# Altium PCB MCH_CLKB_PCB.PcbDoc (part 3 of 5)
Units mil, origin at the board's own origin, x right, y up, seen from the top; angles counter-clockwise.
Board outline 7110.67 x 2894.12 mil, 6 copper layers (Top Layer, GND, MidLayer1, MidLayer2, InternalPlane1, Bottom Layer), stack 61.549 mil thick; 421 components, 433 nets, 2112 pads, 1311 vias.
Unrouted connection lines stored in the file: 39.
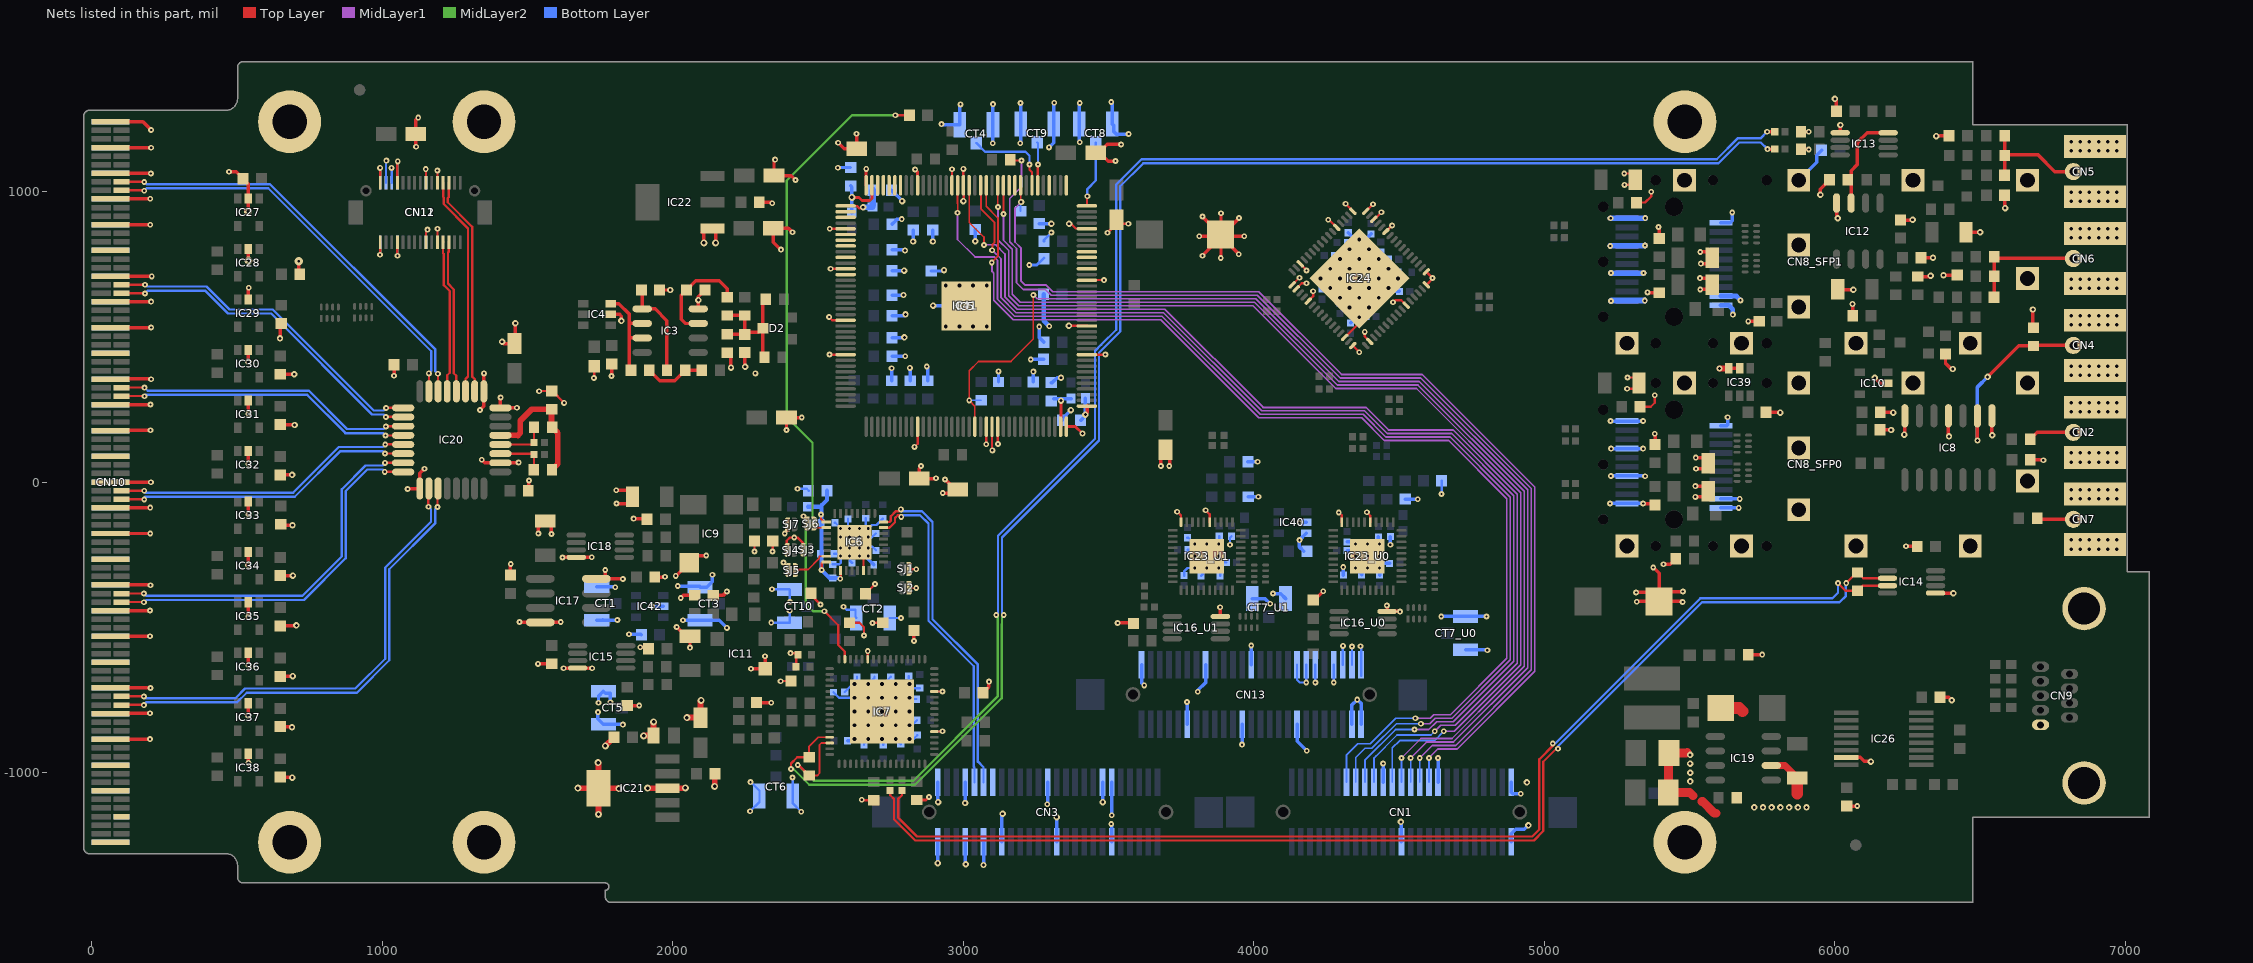
[diagram p7: the nets of this part, all layers, seen from the top]

## Via types
v1: diameter 20, hole 8, Top Layer to Bottom Layer, tented both sides, 842 vias
v2: diameter 22, hole 10, Top Layer to Bottom Layer, tented both sides, 199 vias
v3: diameter 24, hole 12, Top Layer to Bottom Layer, tented both sides, 163 vias
v4: diameter 25.98, hole 12.99, Top Layer to Bottom Layer, tented both sides, 58 vias
v5: diameter 20, hole 10, Top Layer to Bottom Layer, tented both sides, 18 vias
v6: diameter 20, hole 10, Top Layer to Bottom Layer, 16 vias
v7: diameter 28, hole 10, Top Layer to Bottom Layer, tented both sides, 15 vias

## Nets (pads, with @x,y where several pads share a name; then routed paths per layer and width w, separated by ;. In a path a pad name is that pad's centre, name@x,y a point inside that pad or via, vN(x,y) a via of type N, cw(c..) or ccw(c..) an arc to the next point about the centre after c; other vN are vias at no path point) (continued)
DMTDCLK_MAIN_N: CN3.11 IC6.32 | length 1178.4
  Top Layer w8: IC6.32@2725.78,-137.28 2746.5,-137.28 2751.04,-132.74 2751.04,-117.46 2768.5,-100 2779.5,-100 v1(2785.5,-94)
  Bottom Layer w8: v1@2787.5,-100 2857.3,-100 2894.5,-137.2 2894.5,-236 2894.5,-472 3050.5,-628 3050.5,-962.36 3070.14,-982 CN3.11@3070.14,-1033.86
DMTDCLK_MAIN_P: CN3.9 IC6.31 | length 1176.7
  Top Layer w8: IC6.31@2725.78,-156.96 2746.5,-156.96 2752.19,-151.28 2752.3,-151.28 2765.04,-138.54 2765.04,-123.46 2774.5,-114 2786.5,-114 v1(2786.5,-120)
  Bottom Layer w8: v1@2791.5,-114 2851.5,-114 2880.5,-143 2880.5,-262 ; 2880.5,-236 2880.5,-262 ; CN3.9@3038.64,-1033.86 3038.64,-982 3036.5,-979.86 3036.5,-633.8 2880.5,-477.8 2880.5,-262
DMTDCLK_SLOT1_N: CN10.18 IC20.26 | length 1621.5
  Top Layer w8: CN10.18@101.42,-737.54 179.04,-737.54 v1(179.5,-738) ; IC20.26@1158.74,-24.32 1158.74,-84.24 v1(1159.5,-85)
  Bottom Layer w8: v1@179.04,-737.54 185.5,-744 494.7,-744 527.7,-711 907.5,-711 1010.5,-608 1010.5,-294.5 1168,-137 1168,-93.5 v1(1159.5,-85)
DMTDCLK_SLOT1_P: CN10.17 IC20.27 | length 1646.2
  Top Layer w8: CN10.17@101.42,-767.06 178.56,-767.06 v1(179.5,-768) ; IC20.27@1190.24,-24.32 1190.24,-85.74 v1(1190.5,-86)
  Bottom Layer w8: v1@178.56,-767.06 187.63,-758 500.5,-758 533.5,-725 913.3,-725 1024.5,-613.8 1024.5,-300.3 1182,-142.8 1182,-94.5 v1(1190.5,-86)
DMTDCLK_SLOT2_N: CN10.30 IC20.23 | length 1297.5
  Top Layer w8: CN10.30@101.42,-383.54 179.04,-383.54 v1(179.5,-384) ; v1(1009.5,66) 1010.26,66.76 IC20.23@1070.18,66.76
  Bottom Layer w8: v1(179.5,-384) 187.5,-392 724.5,-392 860.5,-256 860.5,-25.2 942.7,57 1000.5,57 v1(1009.5,66)
DMTDCLK_SLOT2_P: CN10.29 IC20.24 | length 1297.1
  Top Layer w8: CN10.29@101.42,-413.06 178.56,-413.06 v1(179.5,-414) ; v1(1008.5,35) 1008.76,35.26 IC20.24@1070.18,35.26
  Bottom Layer w8: v1(179.5,-414) 187.5,-406 730.3,-406 874.5,-261.8 874.5,-31 948.5,43 1000.5,43 v1(1008.5,35)
DMTDCLK_SLOT3_N: CN10.42 IC20.21 | length 1035
  Top Layer w8: CN10.42@102.42,-29.53 180.04,-29.54 v1(180.5,-30) ; v1(1010.5,129) 1011.26,129.76 IC20.21@1071.18,129.76
  Bottom Layer w8: v1@183.5,-37 537.7,-37 693.2,-37 850.7,120.5 1002,120.5 v1(1010.5,129)
DMTDCLK_SLOT3_P: CN10.41 IC20.22 | length 1035
  Top Layer w8: CN10.41@102.42,-59.06 179.56,-59.06 v1(180.5,-60) ; v1(1009.5,98) 1009.76,98.26 IC20.22@1071.18,98.26
  Bottom Layer w8: v1@183.5,-51 699,-51 856.5,106.5 1001,106.5 v1(1009.5,98)
DMTDCLK_SLOT4_N: CN10.54 IC20.19 | length 1032.8
  Top Layer w8: CN10.54@103.42,325.46 181.04,325.46 v1(181.5,325) ; v1(1012.5,191) 1013.26,191.76 IC20.19@1073.18,191.76
  Bottom Layer w8: v1(181.5,325) 192.5,314 747.5,314 879,182.5 1004,182.5 v1(1012.5,191)
DMTDCLK_SLOT4_P: CN10.53 IC20.20 | length 1030.3
  Top Layer w8: CN10.53@103.42,295.94 180.56,295.94 v1(181.5,295) ; v1(1011.5,160) 1011.76,160.26 IC20.20@1073.18,160.26
  Bottom Layer w8: v1(181.5,295) 186.5,300 741.7,300 873.2,168.5 1003,168.5 v1(1011.5,160)
DMTDCLK_SLOT5_N: CN10.66 IC20.17 | length 1151.9
  Top Layer w8: CN10.66@105.42,679.46 183.04,679.46 v1(183.5,679) ; v1(1013.5,255) 1014.26,255.76 IC20.17@1074.18,255.76
  Bottom Layer w8: v1(183.5,679) 189.5,673 395.5,673 474.5,594 623.5,594 971,246.5 1005,246.5 v1(1013.5,255)
DMTDCLK_SLOT5_P: CN10.65 IC20.18 | length 1153.6
  Top Layer w8: CN10.65@105.42,649.94 182.56,649.94 v1(183.5,649) ; v1(1012.5,224) 1012.76,224.26 IC20.18@1074.18,224.26
  Bottom Layer w8: v1(183.5,649) 193.5,659 389.7,659 468.7,580 617.7,580 965.2,232.5 1004,232.5 v1(1012.5,224)
DMTDCLK_SLOT6_N: CN10.78 IC20.14 | length 1466.5
  Top Layer w8: CN10.78@102.42,1033.46 v1@180.04,1033.46 ; v1(1191.5,373) 1192.26,372.24 IC20.14@1192.26,312.32
  Bottom Layer w8: v1(180.5,1033) 188.5,1025 613.8,1025 1183,455.8 1183,381.5 v1(1191.5,373)
DMTDCLK_SLOT6_P: CN10.77 IC20.15 | length 1444
  Top Layer w8: CN10.77@102.42,1003.94 179.56,1003.94 v1(180.5,1003) ; v1(1160.5,374) 1160.76,373.74 IC20.15@1160.76,312.32
  Bottom Layer w8: v1(180.5,1003) 188.5,1011 608,1011 1169,450 1169,382.5 v1(1160.5,374)
DMTDCLK_SLOT7_N: CN12.5 IC20.10 | length 792.7
  Top Layer w8: CN12.5@1229.43,1030.36 1229.43,981.43 1225.6,977.6 1225.6,962.9 1309.49,879.01 1309.49,643.3 ; 1309.49,677.99 1309.49,643.3 ; IC20.10@1318.24,312.32 1318.24,355 1309.49,363.75 1309.49,643.3
DMTDCLK_SLOT7_P: CN12.7 IC20.11 | length 767
  Top Layer w8: CN12.7@1209.74,1030.36 1209.74,981.16 1211.5,979.4 1211.5,957.2 1295.49,873.21 1295.49,674 ; IC20.11@1286.74,312.32 1286.74,355 1295.49,363.75 1295.49,674 ; 1295.49,683.79 1295.49,674
DMTDCLK_SLOT8_N: CN12.6 IC20.12 | length 527.1
  Top Layer w8: CN12.6@1229.5,825.56 CN12.6@1229.43,825.64 1229.43,793.03 1226.3,789.9 1226.3,776.1 1226.3,683.3 1246.5,663.1 1246.5,374.5 1255.25,365.75 ; IC20.12@1255.25,312.32 1255.25,365.75 ; 1255.5,366 1255.25,365.75
DMTDCLK_SLOT8_P: CN12.8 IC20.13 | length 532.7
  Top Layer w8: CN12.8@1209.74,825.64 1209.5,825.4 1209.5,787.5 1212.3,784.7 1212.3,756.9 ; 1212.3,762.7 1212.3,756.9 ; 1223.5,368 1223.75,367.75 ; IC20.13@1223.75,312.32 1223.75,367.75 ; 1212.3,756.9 1212.3,677.5 1232.5,657.3 1232.5,376.5 1223.75,367.75
EXT125_N: C105.2 IC7.14 R49.1 | length 5335.8
  Top Layer w6: R49.1@2469.5,-1010.5 2497,-1010.5 2505.5,-1002 2505.5,-905 2512.5,-898 2540.11,-898 IC7.14@2540.38,-898.27
  Top Layer w8: v1(2430.5,-974) 2433,-974 R49.1@2469.5,-1010.5
  Top Layer w12: v1(5767.5,1206) C105.2@5793.78,1206
  MidLayer2 w8: v1@2431.5,-974 2485.5,-1028 2828.5,-1028 3118.5,-738 3118.5,-537 3118.5,-463 v1(3113.5,-458)
  Bottom Layer w8: v1(3113.5,-458) 3119.5,-452 3119.5,-185 3453.5,149 3453.5,451.08 3475.42,473 3475.5,473 3526.5,524 3526.5,1023.8 3613.7,1111 5593.7,1111 5665.7,1183 5744.5,1183 v1(5767.5,1206)
EXT125_P: C104.2 IC7.13 R49.2 | length 5338.3
  Top Layer w6: R49.2@2469.5,-947.5 2469.5,-910 2500.92,-878.58 IC7.13@2540.38,-878.58
  Top Layer w8: v1(2407.36,-988.14) 2407.36,-968.86 2428.71,-947.5 R49.2@2469.5,-947.5
  Top Layer w12: v1(5768.5,1146) C104.2@5793.78,1146
  MidLayer2 w8: v1@2414.6,-986.9 2469.7,-1042 2834.3,-1042 3132.5,-743.8 3132.5,-489 3133.5,-488 3133.5,-462 3135.5,-462 v1(3139.5,-458)
  Bottom Layer w8: v1(3139.5,-458) 3133.5,-452 3133.5,-190.8 3467.5,143.2 3467.5,445.28 3481.22,459 3481.3,459 3540.5,518.2 3540.5,1018 3619.5,1097 5599.5,1097 5671.5,1169 5745.5,1169 v1(5768.5,1146)
EXT_VBB: C74.1 IC12.3 IC13.4 | length 337.2
  Top Layer w12: IC12.3@6056.5,960.46 6056.5,1072 6078.5,1094 6078.5,1169 6111.89,1202.39 IC13.4@6184.18,1202.39
EXTPPSIN: CN4.1 IC8.2 R30.2 | length 643.8
  Top Layer w12: v2(6491.5,143) IC8.2@6491.5,228 ; v2(6526.5,362) 6633,468.5 R30.2@6684.5,468.5 ; R30.2@6691.28,470.72 CN4.1@6814.5,470.72
  Bottom Layer w12: v2(6491.5,143) 6491.5,327 v2(6526.5,362)
EXTPPSOUT: CN2.1 R32.1 | length 158.3
  Top Layer w12: R32.1@6673,148 6696.72,171.72 CN2.1@6821.5,171.72
EXTREF_N: C165.2 IC14.3 R47.2 | length 4088.8
  Top Layer w8: C165.2@2789.5,-1061.72 2789.5,-1078 2776,-1091.5 2776,-1155 2841,-1220 4958.7,-1220 4983,-1195.7 4983,-954.7 5030.6,-907.1 5030.6,-901.1 v1(5029.36,-899.86) ; v1(6011.5,-348) 6011.5,-348.28 6037.71,-374.5 R47.2@6078.5,-374.5 6096.2,-356.8 IC14.3@6181.82,-356.8
  Bottom Layer w8: v1(5029.36,-899.86) 5037.84,-899.86 5537.7,-400 5955.5,-400 ; 5966.5,-400 5955.5,-400 ; v1(6011.5,-348) 6011.5,-381 5992.5,-400 5955.5,-400
EXTREF_P: C166.2 IC14.2 R47.1 | length 4118.6
  Top Layer w8: C166.2@2748.5,-1061.72 2748.5,-1078 2762,-1091.5 2762,-1161 2835,-1234 4964.5,-1234 4997,-1201.5 4997,-962.99 5041.74,-918.24 v1(5047.74,-918.24) v1@5043.5,-914 ; v1(6039.5,-348) R47.1@6076,-311.5 ; R47.1@6078.5,-311.5 6098.2,-331.2 IC14.2@6181.82,-331.2
  Bottom Layer w8: v1(5047.74,-918.24) 5047.74,-909.76 5543.5,-414 6016.5,-414 6038.5,-392 6038.5,-349 v1(6039.5,-348)
EXTREFIN_10M: C60.1 CN6.1 R33.2 R34.2 | length 420.7
  Top Layer w12: C60.1@6549,636 R34.2@6549,708 R33.2@6549,776 ; R33.2@6552.27,772.72 R33.2@6549,776 ; CN6.1@6822.5,769.72 6555.27,769.72 R33.2@6549,776
EXTREFIN_125M: C78.1 CN5.1 R41.2 R42.2 | length 394.4
  Top Layer w12: C78.1@6585,1056 R42.2@6585,1124 R41.2@6585,1192 ; R42.2@6587,1126 6700.22,1126 6757.5,1068.72 CN5.1@6821.63,1068.72
EXTREFOUT: CN7.1 R46.1 | length 133.3
  Top Layer w12: R46.1@6697.27,-124.28 R46.1@6697,-124 6700.27,-127.28 CN7.1@6828.5,-127.28
FPGA_AUXOUT1: CT4.1 IC5.7 | length 306.4
  Top Layer w8: v1(3228.5,1093) 3228.5,1075 3236.88,1066.62 IC5.7@3236.88,1021.35
  Bottom Layer w8: CT4.1@3045.41,1167.01 3075.42,1137 3214.5,1137 3228.5,1123 v1(3228.5,1093)
FPGA_AUXOUT2: CT8.1 IC5.144 | length 231.2
  Top Layer w6: IC5.144@3425.85,950.49 3425.85,982.35 v1(3427.5,984)
  Bottom Layer w8: v1(3427.5,984) 3427.5,1009 3456.41,1037.91 CT8.1@3456.41,1169.01
FPGA_AUXOUT3: CT9.1 IC5.6 | length 149.3
  Top Layer w8: IC5.6@3256.56,1021.35 3256.56,1085.94 3256.5,1086 3256.5,1092 v1(3257.5,1093)
  Bottom Layer w8: CT9.1@3254.56,1169.01 3257.5,1166.06 v1(3257.5,1093)
FPGA_CONF_D0: CN1.23 IC5.13 | length 3711.5
  Top Layer w6: IC5.13@3118.77,1022.35 IC5.13@3118.77,1021.35 3118.77,947.73 v1(3119.5,947)
  MidLayer1 w6: v1(3119.5,947) 3119.5,834.22 3156.61,797.11 3156.61,641.92 3191.53,607 3997.68,607 4282.68,322 4560.38,322 4919.5,-37.12 4919.5,-628.92 4690.42,-858 v1(4654.5,-858)
  Bottom Layer w6: CN1.23@4477.22,-1033.86 4477.22,-915.28 4502.5,-890 4622.5,-890 v1(4654.5,-858)
FPGA_DCLK: CN1.25 IC5.12 | length 3688.8
  Top Layer w6: v1@3135.5,923 3138.5,926 3138.5,1022.31 IC5.12@3138.45,1022.35
  MidLayer1 w6: v1(3138.5,923) 3138.5,832.19 3169.09,801.59 3169.09,646.41 3196.5,619 3227.5,619 ; 3224.5,619 3227.5,619 ; 3240.5,619 3248.5,619 ; v1(4508.72,-949.8) 4575.72,-882.8 4682.59,-882.8 4862.95,-702.45 ; 4866.45,-698.95 4862.95,-702.45 ; 3227.5,619 3248.5,619 ; 3248.5,619 4002.65,619 4287.65,334 4565.35,334 4931.5,-32.15 4931.5,-633.89 4862.95,-702.45
  Bottom Layer w6: CN1.25@4508.72,-1033.86 v1@4508.72,-956 ; v1@4508.72,-949.02 v1@4508.72,-942.8
FPGA_DONE: CN1.27 IC5.92 R23.2 | length 3859.6
  Top Layer w6: IC5.92@3040.03,191.65 3040.03,261.47 v1(3020.5,281) 3020.5,383 3052.5,415 3164.22,415 3241.5,492.28 v1(3241.5,644)
  MidLayer1 w6: v1(3241.5,644) 3254.5,631 3296.5,631 4007.62,631 4292.62,346 4570.32,346 4943.5,-27.18 4943.5,-638.86 4687.56,-894.8 4595.22,-894.8 v1(4540.22,-949.8)
  Bottom Layer w6: v1@3021,281.5 R23.2@3061.5,281.5 ; CN1.27@4540.22,-1033.86 v1@4540.22,-956
FPGA_NCONF: CN1.29 R22.1 | length 3767.4
  Top Layer w6: R22.1@3162,1109 3164,1107 v1(3200.5,1107)
  MidLayer1 w6: v1@3198.5,1105 v1(3200.5,1107) 3200.5,1016 3160.5,976 3160.5,827.16 3183.58,804.08 3183.58,685.92 3206.5,663 3282.5,663 3302.5,643 4012.59,643 4297.59,358 4575.29,358 4955.5,-22.21 4955.5,-646.82 4695.52,-906.8 4614.71,-906.8 v1(4571.71,-949.8)
  Bottom Layer w6: CN1.29@4571.71,-1033.86 v1@4571.71,-955
FPGA_NSTAT: CN1.31 IC5.9 R24.1 | length 3643.7
  Top Layer w6: v2@3198.51,964.99 IC5.9@3198.51,1022.35
  MidLayer1 w6: v2(3199.5,964) 3178.5,943 3178.5,826.13 3198.56,806.07 3198.56,692.93 3213.5,678 3285.5,678 3308.5,655 4017.56,655 4302.56,370 4580.26,370 4967.5,-17.24 4967.5,-651.79 4700.49,-918.8 4634.21,-918.8 v1(4603.21,-949.8)
  Bottom Layer w6: R24.1@3197.5,932.5 3197.5,962 v2(3199.5,964) ; CN1.31@4603.21,-1033.86 v1@4603.21,-953.29
FREE_2V5_1: IC5.39
FREE_2V5_2: IC5.38
FREE_2V5_11: IC5.136
FREE_2V5_12: IC5.30
FREE_2V5_13: IC5.31
FREE_2V5_14: IC5.32
FREE_2V5_15: IC5.33
FREE_2V5_16: IC5.34
FREE_2V5_19: IC5.42
FREE_2V5_20: IC5.43
FREE_2V5_21: IC5.44
FREE_2V5_22: IC5.46
FREE_2V5_23: IC5.49
FREE_2V5_27: IC5.1
FREE_2V5_28: IC5.10
FREE_2V5_31: IC5.11
FREE_2V5_33: IC5.4
FREE_2V5_34: IC5.135
FREE_2V5_35: IC5.133
GND: C3.1 C7.2 C8.2 C10.1 C11.1 C12.1 C13.2 C14.1 C15.2 C16.1 C17.2 C18.1 C19.2 C20.2 C21.2 C22.2 C23.2 C24.1 C25.2 C26.1 C27.2 C28.1 C29.2 C30.1 C31.2 C32.1 C33.2 C34.1 C35.2 C36.2 C37.1 C38.1 C39.1 C40.1 C41.2 C42.2 C43.2 C44.2 C45.2 C46.2 C47.2 C48.2 C49.2 C50.2 C51.2 C52.2 C53.2 C54.2 C55.1 C56.1 C57.2 C58.1 C59.2 C61.2 C62.2 C63.2 C64.1 C65.1 C66.2 C67.2 C68.2 C69.2 C70.2 C71.2 C72.1 C73.1 C74.2 C75.1 C76.2 C77.2 C79.2 C80.2 C81.2 C82.2 C83.2 C84.2 C85.1 C86.2 C87.1 C88.2 C89.1 C90.1 C91.1 C92.1 C93.1 C94.1 C95.1 C96.1 C97.2 C98.2 C99.1 C101.1 C102.2 C106.1 C107.1 C108.1 C109.2 C111.2 C112.1 C113.2 C115.2 C116.1 C117_SFP0.2 C117_SFP1.2 C118_SFP0.2 C118_SFP1.2 C119.2 C120_SFP0.1 C120_SFP1.1 C121_SFP0.1 C121_SFP1.1 C122_SFP0.1 C122_SFP1.1 C123_SFP0.1 C123_SFP1.1 C124.1 C125.2 C126.1 C128_U0.1 C128_U1.1 C129_U0.1 C129_U1.1 C130_U0.1 C130_U1.1 C131_U0.1 C131_U1.1 C132_U0.1 C132_U1.1 C133_U0.1 C133_U1.1 C134_U0.1 C134_U1.1 C135_U0.1 C135_U1.1 C136.1 C139.2 C141.2 C142.2 C143.2 C144.2 C145.2 C146.2 C147.2 C148.2 C149.2 C150.2 C151.2 C152.2 C153.2 C154.1 C155.1 C156.1 C157.1 C158_U0.1 C158_U1.1 C159_U0.1 C159_U1.1 C162.1 C163_U0.1 C163_U1.1 C164.2 C167.2 C168.2 C178.1 C188.2 C189.2 C190.2 C191.2 C192.2 C193.2 C194.2 C195.2 C196.2 C197.2 C198.2 C199.2 C200.1 C201.1 C202.1 CN1.21 CN1.26 CN1.33 CN1.49 CN1.50 CN2.2 CN3.1 CN3.2 CN3.7 CN3.8 CN3.12 CN3.13 CN3.16 CN3.25 CN3.28 CN3.37 CN3.39 CN3.40 CN4.2 CN5.2 CN6.2 CN7.2 CN8_SFP0.1 CN8_SFP0.9 CN8_SFP0.10 CN8_SFP0.11 CN8_SFP0.14 CN8_SFP0.17 CN8_SFP0.20 CN8_SFP0.21 CN8_SFP0.22 CN8_SFP0.23 CN8_SFP0.24 CN8_SFP0.25 CN8_SFP0.26 CN8_SFP0.27 CN8_SFP0.28 CN8_SFP0.29 CN8_SFP0.30 CN8_SFP0.31 CN8_SFP1.1 CN8_SFP1.9 CN8_SFP1.10 CN8_SFP1.11 CN8_SFP1.14 CN8_SFP1.17 CN8_SFP1.20 CN8_SFP1.21 CN8_SFP1.22 CN8_SFP1.23 CN8_SFP1.24 CN8_SFP1.25 CN8_SFP1.26 CN8_SFP1.27 CN8_SFP1.28 CN8_SFP1.29 CN8_SFP1.30 CN8_SFP1.31 CN9.5 CN9.10 CN9.11 CN10.1 CN10.4 CN10.7 CN10.10 CN10.13 CN10.16 CN10.19 CN10.22 CN10.25 CN10.28 CN10.31 CN10.34 CN10.37 CN10.40 CN10.43 CN10.46 CN10.49 CN10.52 CN10.55 CN10.58 CN10.61 CN10.64 CN10.67 CN10.70 CN10.73 CN10.76 CN10.79 CN10.82 CN10.85 CN10.86 CN10.89 CN10.92 CN10.95 CN10.98 CN10.101 CN10.104 CN10.107 CN10.110 CN10.113 CN10.116 CN10.119 CN10.122 CN10.125 CN10.128 CN10.131 CN10.134 CN10.137 CN10.140 CN10.143 CN10.146 CN10.149 CN10.152 CN10.155 CN10.158 CN10.161 CN10.164 CN10.167 CN10.170 CN11.13 CN11.14 CN11.23 CN11.24 CN11.25 CN11.27 CN11.29 CN11.30 CN12.9 CN12.10 CN12.13 CN12.14 CN12.23 CN12.24 CN12.29 CN12.30 CN13.1 CN13.12 CN13.15 CN13.24 CN13.25 CN13.35 CN13.36 CN13.37 CN13.39 CN13.43 CN13.45 CN13.47 CN13.48 CN13.49 CN13.50 CT1.2 CT2.2 CT3.2 CT4.2 CT5.2 CT6.2 CT7_U0.2 CT7_U1.2 CT8.2 CT9.2 CT10.2 D6.1 IC3.4 IC4.2 IC5.19 IC5.21 IC5.27 IC5.36 IC5.41 IC5.48 IC5.57 IC5.63 IC5.82 IC5.94 IC5.95 IC5.96 IC5.108 IC5.118 IC5.123 IC5.131 IC5.140 IC5.145 IC6.10 IC6.15 IC6.22 IC6.PAD IC7.37 IC7.44 IC7.59 IC7.PAD IC8.1 IC8.4 IC8.7 IC9.3 IC10.2 IC11.2 IC12.4 IC13.5 IC14.5 IC15.8 IC16_U0.4 IC16_U1.4 IC17.4 IC17.8 IC18.8 IC19.6 IC20.2 IC20.8 IC20.9 IC20.25 IC21.3 IC21.6 IC22.1 IC23_U0.35 IC23_U0.40 IC23_U0.PAD IC23_U1.35 IC23_U1.40 IC23_U1.PAD IC24.2 IC24.11 IC24.16 IC24.17 IC24.27 IC24.30 IC24.32 IC24.33 IC24.37 IC24.46 IC24.49 IC24.50 IC24.53 IC24.62 IC24.64 IC24.65 IC26.15 IC27.2 IC28.2 IC29.2 IC30.2 IC31.2 IC32.2 IC33.2 IC34.2 IC35.2 IC36.2 IC37.2 IC38.2 IC39.2 IC39.3 IC40.2 IC40.3 IC41.2 IC41.5 IC42.2 pad. R13.1 R21.1 R27.1 R30.1 R50.1 R56.1 R60.2 R61.1 R63.1 R64.1 R70_SFP0.1 R70_SFP1.1 R83.2 R84.1 SJ1.1 SJ2.1 SJ3.1 SJ4.1 SJ5.1 SJ5.2 SJ6.1 SJ6.2 SJ7.1 | length 27746.4
  Top Layer w6: SJ5.2@2425.28,-301 2466.3,-301 2504.35,-262.95 2504.7,-262.6 2504.7,-256.1 2505.41,-255.39 IC6.15@2528.43,-255.39 IC6.15@2528.93,-255.39 ; SJ6.2@2488.28,-143 2488.28,-155.22 2487.5,-156 2488.46,-156.96 2528.93,-156.96 2507.46,-156.96
  Top Layer w8: v1(992.3,782.7) 993.2,783.6 CN12.30@993.2,825.64 ; v1(992.8,1081.5) 993.2,1081.1 CN12.29@993.2,1030.36 ; CN12.24@1052.26,825.64 1052.26,779.84 v1(1052.8,779.3) ; CN12.23@1052.26,1030.36 1052.26,1102.56 v1(1053.5,1103.8) ; v1(1150,1077.1) 1150.69,1076.41 CN12.13@1150.69,1030.36 ; CN12.14@1150.69,825.64 1150.69,868.89 1150.8,869 v1(1156.1,869) ; v1(1189.9,1072.4) 1190.06,1072.24 CN12.9@1190.06,1030.36 ; CN12.10@1190.06,825.64 1190.06,871.56 v1(1190.5,872) ; v1(1540.2,312.8) 1540.9,313.5 C3.1@1583,313.5 1585.9,313.5 1624.4,275 v1@1629.5,275 ; v1(1728.5,358) 1729.5,359 C8.2@1729.5,398.54 ; v1(2281.5,-239) C96.1@2281.5,-203.5 ; v1(2343.5,-239) 2344.5,-238 C99.1@2344.5,-203.5 ; v1(2371.5,-686) 2372.5,-685 C95.1@2407,-685 ; v1(2381.5,-277) 2397.72,-293.22 SJ5.1@2397.72,-301 ; v1(2385.5,-177) 2395.72,-166.78 SJ7.1@2395.72,-143 ; SJ4.1@2389.72,-238 SJ4.1@2389.72,-231 ; SJ4.1@2392.72,-231 2392.72,-202.16 2403.88,-191 v1(2418.5,-191) 2429.5,-191 2448.72,-210.22 SJ3.1@2448.72,-238 ; v1(2405.5,-589) 2424.88,-589 C92.1@2430.88,-595 2424.88,-601 C89.1@2424.88,-636 ; C102.2@2476,-383 2476,-388.5 v1(2509,-421.5) ; v1(2538.5,568) 2549.5,557 2594.93,557 IC5.57@2595.15,556.79 ; v1(2539.5,439) 2539.82,438.68 IC5.63@2595.15,438.68 ; v1(2540.5,872) 2540.75,871.75 IC5.41@2595.15,871.75 ; v1(2543.5,734) IC5.48@2595.15,733.95 ; v1@2550.5,734 IC5.48@2595.15,733.95 ; R50.1@2608.5,-484.5 2643,-484.5 2658.5,-500 v1(2658.5,-528) ; IC6.PAD@2626.26,-207.75 2656.89,-238.38 IC6.22@2656.89,-304.6 ; C97.2@2664,-384 2696.5,-351.5 v1(2696.5,-351) ; IC7.59@2671.29,-609.88 2671.29,-582.21 v1(2671.5,-582) ; v1(2687.5,-485) 2688,-484.5 R63.1@2723.5,-484.5 ; SJ2.1@2816.28,-365 v1(2838.5,-365) ; SJ1.1@2816.28,-300 v1(2838.5,-300) ; v1(2832.5,121) 2843.18,131.68 IC5.82@2843.18,191.65 ; IC7.37@2900.62,-858.9 2927.6,-858.9 v1(2928.5,-858) ; IC7.44@2900.62,-721.1 2928.4,-721.1 v1(2928.5,-721) ; IC5.21@2961.29,1022.35 2961.29,1076.79 v1(2961.5,1077) ; v2@3000.5,966.68 3000.81,967 3001.66,966.16 IC5.19@3001.66,1022.35 ; v1(3000.5,1078) 3000.66,1077.84 IC5.19@3000.66,1022.35 ; IC5.94@3079.4,191.65 3079.4,130.1 v1(3079.5,130) ; IC5.95@3099.08,191.65 3099.08,110.42 v1(3100.5,109) ; IC5.96@3118.77,191.65 3118.77,131.73 v1(3119.5,131) ; v2(3363.5,538) 3363.6,538.1 IC5.123@3426.85,538.1 ; v2(3364.5,889) 3371.5,889 3387.75,872.75 IC5.140@3426.85,872.75 ; IC5.118@3425.85,438.68 3489.18,438.68 v1(3489.5,439) ; IC5.131@3425.85,695.58 3483.92,695.58 v1(3484.5,695) ; C20.2@3679.5,90 3696.5,107 C20.2@3696.5,110.82 3696.5,100 C20.2@3707.5,89 ; v1(3736.5,-102) 3749.78,-115.28 IC23_U1.40@3749.78,-138.02 ; v1(3834.5,-97) 3848.2,-110.7 IC23_U1.35@3848.2,-138.02 ; IC24.49@4132.44,678.73 4156.71,703 v1(4157.5,703) ; IC24.50@4146.36,664.81 4165.55,684 v1(4181.5,684) ; IC24.46@4160.28,751.11 4181.5,729.89 v1(4181.5,728) ; IC24.53@4188.12,623.05 4204.5,639.44 v1(4204.5,657) ; v1(4256.5,903) 4258.94,903 IC24.37@4285.55,876.38 ; v1(4292.5,-105) 4293.5,-105 4302.78,-114.28 IC23_U0.40@4302.78,-138.02 ; IC24.62@4313.39,497.78 4363.5,547.89 v4(4363.5,701) ; v1(4316.5,958) 4341.23,933.27 IC24.33@4341.23,932.06 ; IC24.64@4341.23,469.94 4363.5,447.67 v1(4363.5,447) ; v1(4382.5,517) 4382.5,501.05 IC24.2@4399.69,483.86 ; IC24.32@4385.77,932.06 4386.56,932.06 v1(4410.5,956) ; v1(4389.5,-104) 4401.2,-115.7 IC23_U0.35@4401.2,-138.02 ; IC24.30@4413.61,904.22 4414.72,904.22 v1(4439.5,929) ; IC24.27@4455.37,862.47 4475.9,883 v1(4476.5,883) ; v1(4479.5,619) 4486.5,626 4508.1,626 IC24.11@4524.97,609.13 ; IC24.16@4594.56,678.73 4615.5,699.67 4615.5,702 v1(4615.5,702.33) IC24.17@4594.56,723.27 ; v1(5275.5,1062) 5292.56,1062 C122_SFP1.1@5313.56,1041 5295.56,1023 v1(5276.5,1023) ; v1(5285.5,321) 5306.56,321 C122_SFP0.1@5326.56,341 5307.56,360 v1(5286.5,360) ; C123_SFP1.1@5318,962 5347.5,962 5369.5,984 5368.5,985 v1(5368.5,999) ; C123_SFP0.1@5330,259 5366.5,259 5380.5,273 v1(5380.5,299) ; IC5.48@2595.15,733.95 IC5.48@2595.15,733.95 IC5.48@2595.15,733.95
  Top Layer w10: C10.1@1955,661 v2(1991.5,661) ; v1(2650.5,-1094) 2652,-1095.5 R84.1@2692.5,-1095.5 ; IC5.36@2666.01,1021.35 2666.01,1077.51 v1(2666.5,1078) ; v1(2834.5,1076) 2843.18,1067.32 IC5.27@2843.18,1021.35 ; R83.2@2840.5,-1094.5 2872,-1094.5 v1(2882.5,-1084) ; IC5.108@3355.99,191.65 3385.85,191.65 v2(3410.5,167) ; v1(3496.5,858) 3527.5,889 C113.2@3527.5,902.82 3527.5,896 3534.5,889 v1(3568.5,889)
  Top Layer w12: CN10.13@64.02,-885.17 200.33,-885.17 v1(200.5,-885) ; CN10.16@64.02,-796.59 199.91,-796.59 v1(200.5,-796) ; CN10.19@64.02,-708.01 201.51,-708.01 v1(202.5,-709) ; CN10.25@64.02,-531.17 200.33,-531.17 v1(200.5,-531) ; CN10.28@64.02,-442.59 199.91,-442.59 v1(200.5,-442) ; CN10.31@64.02,-354.01 201.51,-354.01 v1(202.5,-355) ; CN10.37@65.02,-177.17 201.33,-177.17 v1(201.5,-177) ; CN10.40@65.02,-88.58 200.91,-88.59 v1(201.5,-88) ; CN10.43@65.02,0 202.51,-0.01 v1(203.5,-1) ; CN10.73@65.02,885.83 201.33,885.83 v1(201.5,886) ; CN10.76@65.02,974.41 200.91,974.41 v1(201.5,975) ; CN10.79@65.02,1062.99 202.51,1062.99 v1(203.5,1062) ; CN10.82@65.02,1151.57 203.93,1151.57 v1(204.5,1151) ; CN10.85@65.02,1240.16 176.34,1240.16 v1(204.5,1212) ; CN10.49@66.02,177.83 202.33,177.83 v1(202.5,178) ; CN10.52@66.02,266.41 201.91,266.41 v1(202.5,267) ; CN10.55@66.02,354.99 203.51,354.99 v1(204.5,354) ; CN10.61@68.02,531.83 204.33,531.83 v1(204.5,532) ; CN10.64@68.02,620.41 203.91,620.41 v1(204.5,621) ; CN10.67@68.02,708.99 205.51,708.99 v1(206.5,708) ; v1(472.5,1068) 497,1068 C141.2@521,1044 539.5,1025.5 IC27.2@539.5,976.24 539.5,933 v7(537.5,931) ; v2(538.13,-285.01) 539.5,-283.64 IC34.2@539.5,-240.48 ; v2(538.53,-803.77) 539.5,-802.8 IC37.2@539.5,-761.94 ; v2(538.7,413.84) 539.5,414.65 IC30.2@539.5,454.79 ; IC38.2@539.5,-935.76 539.5,-966.77 v2(539.76,-967.03) ; IC36.2@539.5,-588.12 539.5,-629.23 v2(540.57,-630.31) ; v2(539.5,-464.04) IC35.2@539.5,-414.3 ; IC33.2@539.5,-66.67 539.5,-108.84 v2(540.98,-110.33) ; v2(539.5,62.47) IC32.2@539.5,107.15 ; v2(539.5,234.65) IC31.2@539.5,280.97 ; IC29.2@539.5,628.61 539.5,668 v1(540.5,669) ; v7(539.5,762) IC28.2@539.5,802.43 ; v2(648.14,494.42) 648.5,494.78 C164.2@648.5,544.5 ; C148.2@648.5,-1015.5 688.42,-1015.5 v2(690.32,-1017.39) ; C150.2@648.5,-842.16 687.46,-842.16 v2(689.3,-844.01) ; C149.2@648.5,-668.83 691.23,-668.83 v2(692.13,-667.92) ; C144.2@648.5,-495.5 702.52,-495.5 v2(704.38,-493.64) ; C151.2@648.5,-322.16 v2(692.2,-322.16) ; C167.2@648.5,-148.83 v2(691.13,-148.83) ; C143.2@648.5,24.5 v2(690.03,24.5) ; C152.2@648.5,197.84 696.9,197.84 v2(698.42,196.32) ; C153.2@648.5,371.17 696.86,371.17 v2(697.07,370.96) ; v7(712.5,760) 712.5,719.5 C142.2@716,716 ; v1(1040.5,366) 1041,366.5 C145.2@1041,404 ; v1(1087.5,-24) 1089.18,-22.32 IC20.25@1129.26,-22.32 1129.26,29.76 v1(1145.5,46) ; v1(1116.7,1154.4) 1115.88,1155.22 C168.2@1115.88,1198.4 1115.88,1246.58 v1(1123.7,1254.4) ; v1(1336.5,248) 1349.74,261.24 IC20.9@1349.74,312.32 1349.74,373.24 v1(1350.5,374) ; v1(1342.5,77) 1353.24,66.26 IC20.2@1406.82,66.26 1468.76,66.26 v1(1469.5,67) ; v1(1407.5,291) 1406.82,290.32 IC20.8@1406.82,255.24 1462.74,255.24 v1(1463.5,256) ; v2(1412.91,482.85) 1418.97,476.79 C147.2@1455.15,476.79 1458.47,480.1 v2(1458.47,546.48) ; C108.1@1441.5,-320.5 1441.5,-283 v1(1442.5,-282) ; v1(1472.5,-482) 1543.04,-482 IC17.4@1544.04,-483 1613.5,-483 v1(1614.5,-482) ; C146.2@1504,-32 1504,3.5 v1(1505.5,5) ; v1(1536.5,-626) 1537,-625.5 C94.1@1583.5,-625.5 ; v1(1537.5,-177) 1537.5,-156.94 C93.1@1560.5,-133.94 1572.44,-133.94 1582.5,-144 v1(1582.5,-179) ; v1(1620.5,-260) 1621.11,-259.39 IC18.8@1667.82,-259.39 1721.11,-259.39 v1(1721.5,-259) ; v1(1624.5,-641) 1625.11,-640.39 IC15.8@1672.82,-640.39 1721.89,-640.39 v1(1722.5,-641) ; IC17.8@1764.5,-333 IC17.8@1768.5,-333 ; v1(1767.5,-303) 1767.5,-321 1755.5,-333 IC17.8@1736.96,-333 IC17.8@1768.5,-333 ; IC17.8@1781.5,-333 IC17.8@1768.5,-333 ; IC4.2@1786.74,577 1817.5,577 1823.5,571 v2(1823.5,555) ; C7.2@1789.5,406.5 v1@1789.5,373 ; v1@1790.5,364 v1(1789.5,365) ; v1(1805.5,-28) 1853.5,-28 1854.5,-29 1854.5,-43.06 C101.1@1861.44,-50 1856.5,-54.94 1856.5,-75 1807.5,-75 v1(1806.5,-74) ; v1(1828.5,-334) 1827.5,-333 IC17.8@1768.5,-333 ; C98.2@1843.5,-769.5 1884,-769.5 v1(1884.5,-769) ; v1(1865.5,-126) 1910,-126 C124.1@1912,-128 ; v1(1888.5,-569) 1912,-569 C90.1@1917,-574 ; C86.2@1938,-327 1972.5,-327 v1(1973.5,-326) ; v1(2010.5,-323) 2012.5,-323 IC9.3@2057.5,-278 2071.5,-264 2071.5,-257 2075.5,-253 v1(2115.5,-253) ; v1(2013.5,-499) 2040.5,-526 2054.56,-526 C91.1@2059.5,-530.94 v1(2059.5,-570) ; v1(2027.5,-399) 2037,-389.5 C87.1@2076.5,-389.5 ; IC3.4@2087.96,596 2087.96,637.96 C12.1@2111,661 ; v3(2107.5,823) 2107.5,855 2102.5,860 2114.95,872.45 IC22.1@2137.7,872.45 2140.15,870 2142.5,870 2147.5,865 v3(2147.5,823) ; C85.1@2139.5,-390.5 2173,-390.5 v1(2186.5,-377) ; R13.1@2187.5,445.5 2200.5,432.5 v2(2200.5,394) ; C11.1@2247.5,445.5 2247.5,399 v2(2249.5,397) ; v1(2269.5,-643) 2270.12,-642.38 IC11.2@2318.23,-642.38 2318.23,-600.73 v1(2317.5,-600) ; C162.1@2289,-759 2338.5,-759 v1(2339.5,-760) ; C112.1@2298,963 2339.5,963 v1(2342.5,960) ; v1(2352.5,1110) 2348.68,1106.18 C21.2@2348.68,1055 2407.5,1055 v1(2422.5,1040) ; v1(2372.5,800) 2346.68,825.82 C71.2@2346.68,874 2398.5,874 v1(2412.5,860) ; v1(2391.5,179) 2391.68,179.18 C111.2@2391.68,222 v1(2444.5,222) ; v1(2450.5,-118) 2460.72,-128.22 SJ6.1@2460.72,-143 ; v1(2569.5,1168) 2590.5,1147 C115.2@2633.32,1147 2633.32,1198.18 v1(2632.5,1199) ; v1(2830.5,-547) C51.2@2830.5,-510.5 ; v1(2854.5,55) 2855.5,54 2856.5,54 2848.68,46.18 C22.2@2848.68,12 2905.5,12 v1(2906.5,13) ; v1(2929.5,-38) 2930.5,-39 2960.5,-39 2973.5,-26 C19.2@2981.32,-26 2972.5,-26 v1(2937.5,9) ; C88.2@3068,-726 3088.5,-705.5 v1(3088.5,-687) ; v1(3524.5,1105) 3523.5,1104 3499.5,1104 3469.5,1134 C57.2@3455.68,1134 3467.5,1134 3496.5,1163 3541.5,1163 3543.5,1161 v1(3543.5,1162) ; v1(3531.5,-485) 3584,-485 C129_U1.1@3586,-487 ; C20.2@3679.5,82 C20.2@3679.5,90 ; v1(3680.5,55) 3679.5,56 3679.5,93.82 C20.2@3696.5,110.82 ; C20.2@3707.5,89 3708.5,89 3710.5,91 3710.5,56 v1(3709.5,55) ; v1(3812.5,846) C198.2@3887.45,846 ; v1(3823.5,779) 3887.45,842.95 C198.2@3887.45,846 ; v1(3823.5,914) C198.2@3887.45,850.05 ; v1(3884.5,-431) 3885.18,-431.68 IC16_U1.4@3885.18,-462.61 ; v1(3886.5,771) 3887.45,771.95 C198.2@3887.45,846 ; v1(3887.5,925) v1(3887.5,925) C198.2@3887.45,850.05 ; v1(3948.5,784) 3948.5,784.95 C198.2@3887.45,846 ; v1(3949.5,909) 3949.5,908.05 C198.2@3887.45,846 ; v1(3967.5,846) C198.2@3887.45,846 ; C129_U0.1@4204.5,-406.5 4209,-406.5 v1(4239.5,-376) ; v1(4458.5,-425) 4459.18,-425.68 IC16_U0.4@4459.18,-445.61 4503.11,-445.61 v1(4503.5,-446) ; v1(5316.5,-380) 5364.55,-380 C199.2@5395.55,-411 ; v1(5318.5,-412) 5319.5,-411 C199.2@5395.55,-411 ; v1(5340.5,-74) 5377,-74 C118_SFP0.2@5381.5,-78.5 ; v1(5355.5,653) 5357,651.5 C118_SFP1.2@5395.5,651.5 ; v1(5375.5,-294) 5395.55,-314.05 C199.2@5395.55,-411 ; v1(5380.5,166) 5381.5,165 C121_SFP0.1@5381.5,129.5 ; v1(5393.5,878) 5395.5,876 C121_SFP1.1@5395.5,838.5 ; v1(5410.5,-283) 5434,-283 R70_SFP0.1@5453,-264 ; v1(5476.5,-413) 5474.5,-411 C199.2@5395.55,-411 ; v1(5477.5,-377) 5476.5,-378 5413.5,-378 5413.5,-393.05 C199.2@5395.55,-411 ; v1(5520.5,-51) 5553.5,-51 5553.5,-43.06 C117_SFP0.2@5564.56,-32 5564.56,-15.06 5561.5,-12 5559.5,-14 v1(5520.5,-14) ; v1(5521.5,84) 5522.5,83 5553.5,83 5553.5,75.06 C120_SFP0.1@5564.56,64 5550.5,49.94 5550.5,46 v1(5522.5,46) ; v1(5536.5,702) 5575.5,702 5576.5,701 5576.5,681.06 C117_SFP1.2@5578.56,679 5578.56,666.06 5575.5,663 v1(5537.5,663) ; v1(5537.5,792) 5558.56,792 C120_SFP1.1@5578.56,772 5569.5,762.94 5569.5,754 5567.5,752 v1(5539.5,752) ; IC39.3@5635.1,391.24 IC39.2@5672.5,391.24 ; R56.1@5702,-595 5749.5,-595 v1(5750.5,-594) ; v1(5702.5,553) 5703,553.5 R70_SFP1.1@5740.5,553.5 ; C157.1@5764,240 5811.5,240 v2(5812.5,239) ; R60.2@5884,1145 v1(5910.5,1145) ; R61.1@5884,1206 v1(5910.5,1206) ; v2(5950.5,989) 5950.5,1008.5 C74.2@5982,1040 ; v2@6002.5,1320 6006,1316.5 C81.2@6006,1276 ; IC12.4@6006.5,960.46 6006.5,912 v2(6010.5,908) ; C55.1@6010.44,664 6012.44,662 v2(6064.5,662) ; IC13.5@6018.82,1202.39 6018.82,1228.32 v2(6019.5,1229) ; IC26.15@6039.54,-947.5 IC26.15@6039.64,-947.6 ; IC26.15@6040.21,-948.17 IC26.15@6039.64,-947.6 ; IC26.15@6040.21,-947.6 IC26.15@6039.64,-947.6 ; C136.1@6041.5,-1115.5 6077,-1115.5 v1(6077.5,-1115) ; IC26.15@6052.06,-947.6 6088.55,-947.6 6102.15,-961.19 6123.58,-961.19 v2@6125.12,-962.73 ; v2(6061.5,613) 6062,612.5 C56.1@6062,572 ; v2(6138.07,358.91) 6156.98,340 IC10.2@6180.74,340 ; C73.1@6156,180 6193.58,180 v2(6194.42,179.17) ; C46.2@6157,240 6200.5,240 v2(6201.5,239) ; C65.1@6225.5,899.5 6228,902 v2@6267.5,902 ; v2(6239.5,163) 6241.5,165 IC8.7@6241.5,228 ; v1(6245.5,-221) 6283,-221 C70.2@6284,-222 ; R27.1@6285.5,707.5 6328,707.5 v2(6330.5,710) ; C76.2@6297,772 v2(6338.5,772) ; IC14.5@6347.18,-382.39 6407.89,-382.39 v2(6408.5,-383) ; v2(6349.5,1191) 6350.5,1192 C82.2@6394,1192 ; C139.2@6362.64,-741.19 6393.15,-741.19 v2(6403.15,-751.19) ; v2(6374.5,712) 6375,712.5 C62.2@6421.5,712.5 ; C64.1@6381.5,440.5 6381.5,409 6401.5,389 v2(6406.5,389) ; IC8.4@6391.5,228 6391.5,159 v2(6393.5,157) ; C75.1@6452.56,860 v2(6500.5,860) ; IC8.1@6541.5,228 6541.5,162 v2(6542.5,161) ; C84.2@6585,988 6585,944.5 v2(6586.5,943) ; C58.1@6673,76 6717.5,76 v1(6718.5,75) ; R30.1@6681.5,543.5 6681.5,593 v2(6682.5,594) ; v1(1789.5,365) v1@1789.5,373 ; v1(1789.5,365) v1@1789.5,373 ; C198.2@3887.45,846 C198.2@3887.45,850.05
  Top Layer w20: v3(1673.5,-1054) IC21.6@1744.3,-1054 ; v3(1743.5,-966) 1744.3,-966.8 IC21.6@1744.3,-1054 ; v3(1744.5,-1144) 1744.3,-1143.8 IC21.6@1744.3,-1054 ; v3(1768.5,-908) 1769,-908 C126.1@1798,-879 ; v3(1814.5,-1055) 1813.5,-1054 IC21.6@1744.3,-1054 ; v3(1899.5,-874) 1900.5,-873 C106.1@1934.07,-873 1934.07,-826.43 v3(1934.5,-826) ; v3(1913.5,-1054) IC21.3@1981.5,-1054 2042.5,-1054 v3(2043.5,-1053) ; v3(2048.5,-811) 2094.68,-811 C109.2@2095.5,-811.82 2095.5,-754 v3(2097.5,-752) ; v3(2144.5,-1048) 2145,-1047.5 C107.1@2145,-1004 ; v2(5603.5,391) IC39.3@5634.85,391
  Top Layer w24: IC19.6@5781.96,-976 5828.44,-976 C116.1@5871.5,-1019.06
  Top Layer w30: 5492.5,-930 5489.5,-933 C125.2@5429.59,-933 5427.59,-935 C119.2@5427.59,-1069 5501.5,-1069 5512.5,-1080 ; 5542.5,-1100 5545.9,-1100 5585.9,-1140 5592.5,-1140
  Top Layer w40: D6.1@5607.92,-778 5671.5,-778 5682.5,-789 ; 5870.5,-1073 5870.5,-1020.06 C116.1@5871.5,-1019.06
  Bottom Layer w8: v1(992.8,1081.5) 993.2,1081.1 CN11.29@993.2,1030.26 ; v1@993.2,783.6 CN11.30@993.2,825.54 ; CN11.27@1012.89,1030.26 1012.89,1105.19 v1(1014.2,1106.5) ; v1(1032.1,1081.5) 1032.57,1081.03 CN11.25@1032.57,1030.26 ; CN11.24@1052.26,825.54 1052.26,779.84 v1(1052.8,779.3) ; CN11.23@1052.26,1030.26 v1@1052.26,1102.56 ; v1(1150,1077.1) 1150.69,1076.41 CN11.13@1150.69,1030.26 ; CN11.14@1150.69,825.54 1150.69,863.59 v1(1156.1,869) ; v1(2266.5,-1133) 2298.5,-1101 CT6.2@2298.5,-1081 2298.5,-1063 2268.5,-1033 v1(2267.5,-1033) ; v1(2339.5,-484) CT10.2@2402.5,-484.03 v1(2402.5,-443) ; v1(2341.5,-369) 2401.64,-369 CT10.2@2402.5,-369.86 2402.5,-412 v1(2403.5,-413) ; v1(2412.5,-1017) 2412.67,-1017.17 CT6.2@2412.67,-1081 2412.67,-1105.17 v1(2442.5,-1135) ; v1(2429.5,-23) 2461,-23 C48.2@2468,-30 ; C47.2@2550.5,-283.38 2573.12,-283.38 2578.5,-278 2578.5,-255.03 2579.13,-254.4 2571.73,-247 C45.2@2555.12,-247 ; C53.2@2553.5,-723.62 2572.63,-742.76 v4(2626.01,-742.76) ; C49.2@2558.12,-140 2559.22,-140 v6@2579.13,-159.91 ; v1(2587.8,-429.2) 2598.3,-439.7 2629.1,-439.7 2629.1,-464.6 CT2.2@2632.5,-468 ; C52.2@2592.5,-722.62 v4@2619.61,-695.51 ; C41.2@2603.5,-126.62 2603.5,-152.79 v6@2610.63,-159.91 ; v6@2610.63,-254.4 2610.63,-271.41 C189.2@2617.5,-278.28 ; v4(2626.01,-695.51) v4@2619.61,-695.51 ; C69.2@2634.5,-670.62 2634.5,-680.62 v4@2619.61,-695.51 ; C79.2@2658.5,-905.38 2658.5,-899.24 v4(2673.26,-884.49) ; C50.2@2664.5,-124.62 2664.5,-150.8 2673.62,-159.91 2676.13,-157.4 2685.53,-148 2701.12,-148 C44.2@2723.5,-125.62 ; v4(2673.26,-695.51) 2694.5,-674.27 C68.2@2694.5,-670.62 ; v6@2673.62,-222.91 2687.69,-222.91 C191.2@2699.78,-235 ; v6@2673.62,-191.41 2684.37,-191.41 C192.2@2698.78,-177 ; v4(2720.5,-884.49) 2724.5,-888.49 C83.2@2724.5,-905.38 ; v4(2720.5,-695.51) 2725.61,-695.51 C59.2@2750.5,-670.62 ; CT2.2@2746.67,-468 2785.6,-468 v1(2785.7,-467.9) ; v4(2767.74,-884.49) 2784.5,-901.24 C67.2@2784.5,-902.38 ; C66.2@2812.5,-667.62 2812.5,-693.02 v4(2814.99,-695.51) 2829.1,-709.62 C61.2@2850.5,-709.62 ; v4(2814.99,-884.49) 2828.39,-884.49 C63.2@2841.5,-871.38 ; v4(2814.99,-837.24) 2823.63,-837.24 C80.2@2840.88,-820 ; v4(2814.99,-742.76) 2819.23,-747 C54.2@2838.88,-747 ; v2(2827.5,828) v2@2827.5,832 ; v2(2896.68,607.4) 2897.08,607 v2@2901.32,607 ; IC41.5@3054.74,607 3081.5,607 3086.5,612 3086.5,671.73 v4(3081.37,676.87) ; C128_U1.1@3760.5,-323.28 3760.5,-308 3772.5,-296 3796.54,-296 v5(3797.02,-296.48) ; C158_U1.1@3771.5,-191.72 3774.93,-191.72 v5(3797.02,-213.8) ; C131_U1.1@3773.22,-233 3789.5,-233 3797.02,-240.52 v5(3797.02,-255.14) ; C133_U1.1@3818.5,-323.28 3838.36,-303.43 v5(3838.36,-296.48) ; v5(3879.7,-296.48) 3884.5,-301.28 C132_U1.1@3884.5,-323.28 ; v5(3879.7,-255.14) 3901.56,-277 C130_U1.1@3905.78,-277 ; v5(3879.7,-213.8) 3881.5,-212 C159_U1.1@3881.5,-186.72 ; v1(3918.5,-216) 3918.5,-191.72 C163_U1.1@3923.5,-186.72 ; CN13.35@4149.27,-629.13 4149.27,-680.54 4158.5,-689.77 4180.54,-689.77 v1(4180.77,-690) CN13.37@4180.77,-629.13 ; v1@4212.5,-696 v1@4212.26,-695.76 ; CN13.43@4275.26,-666.25 CN13.43@4275.26,-629.13 4275.26,-689.76 v1(4275.5,-690) ; CN13.45@4306.75,-629.13 4306.75,-564.75 v1(4307.5,-564) ; CN13.47@4338.25,-629.13 4338.25,-566.25 v1(4338.5,-566) ; v1(4367.5,-565) 4369.74,-567.24 CN13.49@4369.74,-629.13 CN13.49@4369.74,-666.76 ; v1(4646.5,-41) 4647,-40.5 C135_U0.1@4647,4 ; v1@4212.26,-695.76 CN13.39@4212.26,-629.13 v1(4212.26,-690.24) v1@4212.26,-695.76
  Bottom Layer w10: v1(2568.5,1082) 2569,1082.5 C40.1@2612.5,1082.5 ; v1(3227.5,747) 3253.51,747 3278,771.5 C18.1@3278.5,771 ; C27.2@3278,829 3278,833.5 v1(3303.5,859)
  Bottom Layer w12: CT1.2@1738.5,-361 1801.5,-361 v1(1802.5,-362) ; v1(1742.5,-792) 1742.5,-815.03 CT5.2@1761.5,-834.03 1827.53,-834.03 v1(1828.5,-835) ; v1(1744.5,-760) 1744.5,-736.86 CT5.2@1761.5,-719.86 1768.64,-727 1784.5,-727 1784.5,-757 v1(1785.5,-758) ; CT1.2@1758.5,-474 1757.33,-475.17 CT1.2@1738.5,-475.17 1809.33,-475.17 v1(1809.5,-475) ; v1(1849.5,-524) 1890,-524 C155.1@1892,-526 ; v1(1928.5,-428) IC42.2@1967.74,-428 ; v1(2017.5,-358) 2090.64,-358 CT3.2@2094.5,-361.86 2100.64,-361.86 2117.64,-361.86 2136.5,-343 v1(2136.5,-319) ; v1(2035.5,-476) CT3.2@2094.5,-476.03 2160.53,-476.03 v1(2186.5,-502) ; C77.2@2602.12,-890 2620.5,-890 v4(2626.01,-884.49) ; v6@2673.62,-254.4 2673.62,-265.74 C43.2@2691.88,-284 ; C38.1@2753,1005 2789.5,968.5 v2(2789.5,967) ; C13.2@2753.5,348.5 v1(2753.5,392) ; C28.1@2755,433 v1(2800.5,433) ; C30.1@2755,497 2796.5,497 v2(2797.5,498) ; C32.1@2755,573 2797.5,573 v2(2801.5,577) ; C24.1@2755,643 2791.5,643 2794.5,646 v2(2794.5,644) ; C31.2@2755,727 2795.5,727 v2(2796.5,728) ; C25.2@2755,799 2797.5,799 v2(2799.5,797) ; C15.2@2755,887 2767.5,899.5 2767.5,901 2771.5,905 v1(2788.5,905) ; v1(2816.5,393) 2817.5,392 C16.1@2817.5,348.5 ; v2@2827.5,832 C14.1@2827.5,867.5 ; v1(2874.5,398) 2877.5,395 C34.1@2877.5,348.5 ; C156.1@2890.5,726.5 2930.61,726.5 v2(2933.73,729.61) ; v2(2895.5,828) C35.2@2895.5,867.5 ; v2@2901.32,607 IC41.2@2960.26,607 ; v2(2912.41,-1311.99) 2912.66,-1311.75 CN3.2@2912.66,-1238.58 ; CN3.1@2912.66,-1033.86 2912.66,-1101.16 v2(2913.5,-1102) ; v1(2925.5,1232) 2927.5,1230 CT4.2@2988.33,1230 2988.33,1297.83 v1(2990.5,1300) ; v2(3006.5,-1105) 3007.15,-1104.35 CN3.7@3007.15,-1033.86 ; CN3.8@3007.15,-1238.58 3007.15,-1314.25 v2(3008.74,-1315.84) ; v2(3041.5,829) C36.2@3041.5,869.5 ; v2(3069.69,-1318.3) 3070.14,-1317.85 CN3.12@3070.14,-1238.58 ; v1(3101.5,1166) 3102.5,1167 CT4.2@3102.5,1230 v1(3102.5,1301) ; R21.1@3121.5,349.21 R21.1@3121.5,344.5 v1(3121.5,381) ; CN3.16@3133.13,-1238.58 3133.13,-1144.37 v2(3135.5,-1142) ; v1(3196.5,1166) 3197.47,1166.97 CT9.2@3197.47,1232 v1(3197.5,1305) ; v1(3232.5,422) C29.2@3277,422 C29.2@3275.5,423.5 ; C17.2@3241.5,344.5 v1(3241.5,380) ; v1(3261.5,535) 3261.5,497.5 C23.2@3278,481 ; C26.1@3261.5,889.5 3303,889.5 v2(3303.5,889) ; v1(3289.5,-1109) 3290.61,-1107.89 CN3.25@3290.61,-1033.86 3290.61,-1100.38 3290.44,-1100.55 3290.27,-1100.38 3290.27,-1093.64 ; v1(3295.5,1152) 3311.64,1168.14 CT9.2@3311.64,1232 3311.64,1304.14 v1(3313.5,1306) ; C39.1@3303.5,342.5 3307,342.5 3323.5,359 v2(3336.5,359) ; CN3.28@3322.11,-1238.58 3322.11,-1149.39 v2@3322.5,-1149 ; C37.1@3341,212 3341,218.13 v2(3370.47,247.6) ; v1(3401.5,1170) 3399.33,1172.17 CT8.2@3399.33,1232 3399.33,1302.83 v1(3401.5,1305) ; CN3.37@3479.59,-1033.86 3479.59,-1101.09 v2(3480.5,-1102) ; CN3.40@3509.5,-1237 CN3.40@3511.08,-1238.58 3511.08,-1178.58 v1(3509.5,-1177) ; v1(3509.5,1308) 3513.5,1304 CT8.2@3513.5,1232 3517.5,1228 3517.5,1207 3526.5,1198 v1(3569.5,1198) ; v1(3511.5,-1147) 3511.08,-1146.58 CN3.39@3511.08,-1033.86 3511.08,-1104.58 3511.5,-1105 ; CN13.1@3613.84,-629.13 3613.84,-690.34 v1(3623.5,-700) ; v1(3770.5,-757) 3771.32,-757.82 CN13.12@3771.32,-833.86 ; v1(3807.5,-722) 3807.5,-717 3834.31,-690.19 CN13.15@3834.31,-629.13 ; v1(3959.5,-904) 3960.3,-903.2 CN13.24@3960.3,-833.86 ; C135_U1.1@3980,70 v1(4013.5,70) ; v1(3991.5,-563) 3991.79,-563.29 CN13.25@3991.79,-629.13 3991.79,-573 ; CT7_U1.2@3995.33,-401 4038.5,-401 v1(4056.5,-419) ; v1@4017.5,-49 v1(4016,-50.5) ; v1(4066.5,-384) 4092.5,-384 CT7_U1.2@4109.5,-401 ; CN13.36@4149.27,-833.86 4149.27,-891.77 v1(4182.5,-925) ; v1(4156.5,-139) IC40.2@4180.74,-139 ; C154.1@4172,-238 4157.5,-223.5 v1(4157.5,-200) 4157.5,-199.65 IC40.3@4180.74,-176.4 ; C197.2@4235.5,664.72 4238.38,667.59 v4(4263.28,667.59) ; C202.1@4278.22,780 4284.5,780 v4(4296.69,767.81) ; C132_U0.1@4308.5,-320.28 v1(4308.5,-293) ; C128_U0.1@4321.22,-236 4337.5,-236 4342.5,-241 4350.02,-248.52 v5(4350.02,-255.14) ; C133_U0.1@4321.5,-205.72 4341.93,-205.72 v5(4350.02,-213.8) ; C194.2@4322.22,824 4322.22,809.1 v4(4330.09,801.22) ; C195.2@4325.5,858.28 4349.16,834.63 v4(4363.5,834.63) 4384.84,834.63 C190.2@4404.5,854.28 ; C196.2@4333.5,547.72 4353.16,567.37 v4(4363.5,567.37) ; CN13.48@4338.25,-833.86 4338.25,-767.25 v1(4356.5,-749) 4369.74,-762.24 CN13.50@4369.74,-833.86 ; v5(4350.02,-296.48) 4371.5,-317.96 C131_U0.1@4371.5,-319.28 ; C159_U0.1@4429.5,-188.72 4429.5,-210.61 v5(4432.7,-213.8) ; v4(4430.31,767.81) 4437.5,775 C193.2@4437.5,791.28 ; v5(4432.7,-296.48) 4433.5,-297.28 C158_U0.1@4433.5,-320.28 ; v5(4432.7,-255.14) 4432.7,-267.2 4445.5,-280 C130_U0.1@4467.78,-280 ; v1(4445.5,-969) 4445.73,-969.23 CN1.21@4445.73,-1033.86 ; v4(4463.72,667.59) 4475.31,656 C178.1@4501.78,656 ; v4(4463.72,734.41) 4463.78,734.47 C188.2@4463.78,767 ; v1(4470.5,-216) C163_U0.1@4470.5,-187.72 ; C42.2@4496.88,722 4496.88,701.25 v4(4497.13,701) ; v2(4506.5,-1170) 4508.72,-1172.22 CN1.26@4508.72,-1238.58 ; C134_U0.1@4521.5,-58.5 4564,-58.5 v1(4564.5,-59) ; v1@4634.5,-945.8 v1@4634.7,-946.01 ; CN1.33@4634.7,-1033.86 v1@4634.7,-952 ; v1(4645.5,-463) 4645.67,-462.83 CT7_U0.2@4729.5,-462.83 4801.33,-462.83 v1(4801.5,-463) ; CT7_U0.2@4729.5,-577 4802.5,-577 v1(4804.5,-579) ; CN1.50@4886.67,-1238.58 4886.67,-1210.83 4902,-1195.5 4932,-1195.5 v2(4945.5,-1182) ; CN1.49@4886.67,-1033.86 4886.67,-1068.17 4891.5,-1073 v1(4919.5,-1073) ; v1(5226.5,-74) 5226.93,-73.57 CN8_SFP0.11@5285.65,-73.57 5340.07,-73.57 v1(5340.5,-74) ; v1(5228.5,210) 5228.6,209.9 CN8_SFP0.20@5285.65,209.9 5340.4,209.9 v1(5340.5,210) ; v1(5229.5,21) 5229.58,20.92 CN8_SFP0.14@5285.65,20.92 5346.58,20.92 v1(5347.5,20) ; v1(5230.5,115) 5230.91,115.41 CN8_SFP0.17@5285.65,115.41 5340.09,115.41 v1(5340.5,115) ; CN8_SFP0.10@5608.48,-89.32 5669.19,-89.32 v1(5669.5,-89) ; CN8_SFP0.9@5608.48,-57.82 5673.32,-57.82 v1(5673.5,-58) ; CN8_SFP0.1@5608.48,194.15 5628.65,194.15 5631.5,197 v1(5631.5,223) ; CN8_SFP1.1@5608.48,892.15 5639.65,892.15 5647.5,900 v1(5647.5,928) ; CN8_SFP1.24@5876.2,1039 5876.5,1039 5938.5,1101 5938.5,1125.5 C72.1@5955,1142 ; v1(4016,-50.5) C134_U1.1@3980.5,-50.5 v1(4016,-50.5)
  Bottom Layer w16: C33.2@3277,646 3277,555.5 v1(3296.5,536) ; CN8_SFP1.10@5608.48,608.68 5635.23,608.68 5649.5,594.41 v1(5649.5,576.42) ; CN8_SFP1.9@5608.48,640.18 5661.77,640.18 5675.96,625.99 v1(5675.96,625.31)
  Bottom Layer w20: v1(5227.12,812.84) 5227.69,813.41 CN8_SFP1.17@5285.65,813.41 5346.42,813.41 v1(5347.33,814.32) ; v1(5228.74,908.28) 5229.12,907.9 CN8_SFP1.20@5285.65,907.9 5347.5,907.9 v1(5348.07,908.47) ; v1(5229.82,719.67) 5230.57,718.92 CN8_SFP1.14@5285.65,718.92 5341.17,718.92 v1(5341.92,719.67) ; v1(5230.07,623.3) 5231.2,624.43 CN8_SFP1.11@5285.65,624.43 5345.76,624.43 v1(5345.86,624.53)
  other v1: 4634.5,-949.8 1626.1,272.4 2284.5,374
  other v2: 3321.5,-1154 5723.14,-1119.76 5753.14,-1119.76 5783.14,-1119.76 5813.14,-1119.76 5843.14,-1119.76 5873.14,-1119.76 5903.14,-1119.76 4940.5,-1034 5502.74,-1030.64 5502.74,-1000.64 5502.26,-969.36 6124.55,-962.59 5502.26,-939.36 2088.5,626 6268.5,903 3000.5,967 6000.5,1319
  other v3: 6813.78,-230.61 6845.28,-230.61 6876.78,-230.61 6908.27,-230.61 6939.77,-230.61 6971.26,-230.61 6813.78,-199.11 6845.28,-199.11 6876.78,-199.11 6908.27,-199.11 6939.77,-199.11 6971.26,-199.11 6813.78,-57.38 6845.28,-57.38 6876.78,-57.38 6908.27,-57.38 6939.77,-57.38 6971.26,-57.38 6813.78,-25.88 6845.28,-25.88 6876.78,-25.88 6908.27,-25.88 6939.77,-25.88 6971.26,-25.88 6813.78,68.64 6845.28,68.64 6876.78,68.64 6908.27,68.64 6939.77,68.64 6971.26,68.64 6813.78,100.14 6845.28,100.14 6876.78,100.14 6908.27,100.14 6939.77,100.14 6971.26,100.14 6813.78,241.87 6845.28,241.87 6876.78,241.87 6908.27,241.87 6939.77,241.87 6971.26,241.87 6813.78,273.37 6845.28,273.37 6876.78,273.37 6908.27,273.37 6939.77,273.37 6971.26,273.37 6813.78,367.89 6845.28,367.89 6876.78,367.89 6908.27,367.89 6939.77,367.89 6971.26,367.89 6813.78,399.39 6845.28,399.39 6876.78,399.39 6908.27,399.39 6939.77,399.39 6971.26,399.39 6813.78,541.12 6845.28,541.12 6876.78,541.12 6908.27,541.12 6939.77,541.12 6971.26,541.12 6813.78,572.62 6845.28,572.62 6876.78,572.62 6908.27,572.62 6939.77,572.62 6971.26,572.62 6813.78,667.14 6845.28,667.14 6876.78,667.14 6908.27,667.14 6939.77,667.14 6971.26,667.14 6813.78,698.64 6845.28,698.64 6876.78,698.64 6908.27,698.64 6939.77,698.64 6971.26,698.64 6813.78,840.37 6845.28,840.37 6876.78,840.37 6908.27,840.37 6939.77,840.37 6971.26,840.37 6813.78,871.87 6845.28,871.87 6876.78,871.87 6908.27,871.87 6939.77,871.87 6971.26,871.87 6813.78,966.39 6845.28,966.39 6876.78,966.39 6908.27,966.39 6939.77,966.39 6971.26,966.39 6813.78,997.89 6845.28,997.89 6876.78,997.89 6908.27,997.89 6939.77,997.89 6971.26,997.89 6813.78,1139.62 6845.28,1139.62 6876.78,1139.62 6908.27,1139.62 6939.77,1139.62 6971.26,1139.62 6813.78,1171.12 6845.28,1171.12 6876.78,1171.12 6908.27,1171.12 6939.77,1171.12 6971.26,1171.12
  other v4: 2626.01,-837.24 2673.26,-837.24 2720.5,-837.24 2767.74,-837.24 2626.01,-790 2673.26,-790 2720.5,-790 2767.74,-790 2814.99,-790 2673.26,-742.76 2720.5,-742.76 2767.74,-742.76 2767.74,-695.51 2939.63,535.13 2986.88,535.13 3034.12,535.13 3081.37,535.13 4330.09,600.78 4396.91,600.78 4296.69,634.19 4363.5,634.19 4430.31,634.19 4330.09,667.59 4396.91,667.59 2939.63,676.87 2986.88,676.87 3034.12,676.87 4229.87,701 4296.69,701 4430.31,701 4263.28,734.41 4330.09,734.41 4396.91,734.41 4363.5,767.81 4396.91,801.22
  other v5: 4391.36,-296.48 3838.36,-255.14 4391.36,-255.14 3838.36,-213.8 4391.36,-213.8
  other v6: 2578,-254.5 2608,-254.5 2643,-254.5 2673,-254.5 2578,-227 2608,-227 2643,-227 2673,-227 2578,-189.5 2608,-189.5 2643,-189.5 2673,-189.5 2578,-159.5 2608,-159.5 2643,-159.5 2673,-159.5
JTAG_TCK: CN1.17 IC5.16 | length 3773.2
  Top Layer w6: IC5.16@3059.71,1022.35 3061.03,1021.04 3061.03,940.47 3107.5,894 3107.5,824 3100.5,817 3100.5,803 3097.5,800 v1(3099.5,798)
  MidLayer1 w6: v1@3099.92,798.42 3130.5,767.84 3130.5,634.09 3181.59,583 3689.44,583 4027.44,245 4381.44,245 4459.44,167 4681.44,167 4895.5,-47.06 4895.5,-617 4687.5,-825 4629.63,-825 4602.63,-852 v1(4553.5,-852)
  Bottom Layer w6: CN1.17@4382.74,-1033.86 4382.74,-957.73 4488.47,-852 v1(4553.5,-852)
JTAG_TDI: CN1.13 IC5.15 | length 3896
  Top Layer w6: IC5.15@3077.5,1020.46 3079.4,1022.35 IC5.15@3079.4,1021.35 3079.4,949.1 3119.5,909 3119.5,777 v1(3098.5,756)
  MidLayer1 w6: v1(3098.5,756) 3099.5,755 3099.5,725 3105.5,719 3105.5,625.15 3171.65,559 3324.5,559 ; 3239.5,559 3324.5,559 ; v1(4556.5,-813) 4607.69,-813 4619.69,-801 4677.56,-801 4871.5,-607.06 4871.5,-57 4671.5,143 4449.5,143 4371.5,221 4017.5,221 3679.5,559 3324.5,559
  Bottom Layer w6: CN1.13@4319.74,-1033.86 4319.74,-938.76 4358,-900.5 4401,-900.5 4488.5,-813 v1(4556.5,-813)
JTAG_TDO: CN1.15 IC5.20 | length 3858.8
  Top Layer w6: v1(2980.5,927) 2980.97,927.47 2980.97,958.24 2980.5,958.72 2980.5,1021.88 IC5.20@2980.97,1022.35
  MidLayer1 w6: v1(2980.5,927) 2980.5,835 3040.5,775 3106.37,775 3117.94,763.43 3117.94,629.68 3176.62,571 3244.5,571 ; 3239.5,571 3244.5,571 ; v1(4575.5,-832) 4605.66,-832 4624.66,-813 4682.53,-813 4883.5,-612.03 4883.5,-52.03 4676.47,155 4454.47,155 4376.47,233 4022.47,233 3684.47,571 3244.5,571
  Bottom Layer w6: CN1.15@4351.24,-1033.86 4351.24,-948.26 4383,-916.5 4407,-916.5 4491.5,-832 v1(4575.5,-832)
JTAG_TMS: CN1.19 IC5.18 | length 3815.1
  Top Layer w6: IC5.18@3020.34,1022.35 IC5.18@3021.03,1021.67 ; IC5.18@3021.03,1021.35 3021.03,893.6 3071.5,843.13 v1(3071.5,816)
  MidLayer1 w6: v1(3071.5,816) 3072.5,817 3111.5,817 3143.5,785 3143.5,638.06 3186.56,595 3243.5,595 ; 3239.5,595 3243.5,595 ; v1(4623.5,-858) 4644.5,-837 4694.45,-837 4907.5,-623.95 4907.5,-42.09 4686.41,179 4464.41,179 4386.41,257 4032.41,257 3694.41,595 3243.5,595
  Bottom Layer w6: CN1.19@4414.23,-1033.86 4414.23,-950.27 ; 4422.5,-942 4414.23,-950.27 ; v1(4623.5,-858) 4610.5,-871 4493.5,-871 4414.23,-950.27
NetC1_2: C1.2 IC20.3 R1.2 | length 170.3
  Top Layer w8: IC20.3@1406.82,97.76 1519.63,97.76 C1.2@1522.68,94.7 1522.68,43.18 R1.2@1521.5,42
NetC2_2: C2.2 IC20.4 R2.2 | length 170.9
  Top Layer w8: IC20.4@1406.82,129.25 1516.24,129.25 C2.2@1522.68,135.7 1522.5,135.88 R2.2@1522.5,188
NetC3_2: C3.2 IC20.5 R1.1 R2.1 | length 463.6
  Top Layer w20: IC20.5@1406.82,160.75 1466.85,160.75 1466.9,160.7 1475.1,168.9 1475.1,211.1 1514.5,250.5 C3.2@1583,250.5 1583,190.5 R2.1@1585.5,188 1604.2,169.3 1604.2,61.7 R1.1@1584.5,42
NetC4_1: C4.1 IC7.63 | length 2288.5
  Top Layer w8: v1(2522.2,-445.1) 2570.2,-493.1 2570.2,-561.1 2592.55,-583.45 IC7.63@2592.55,-609.88 ; v1(2766.5,1262.7) 2813.8,1262.7 C4.1@2814.5,1262
  MidLayer2 w8: v1(2522.2,-445.1) 2482.8,-445.1 2458,-420.3 2458,-168.1 2481.1,-145 2481.1,135 2392.5,223.6 2392.5,1038.28 2616.92,1262.7 v1(2766.5,1262.7)
NetC9_1: C9.1 IC3.6 IC3.7 IC4.3 | length 365
  Top Layer w12: IC4.3@1786.74,614.4 1814.1,614.4 1849.58,578.92 1849.58,546 ; C9.1@1856,385 1849.58,391.43 1849.58,496 ; IC3.7@1895.04,496 1849.58,496 ; IC3.6@1895.04,546 1849.58,546 ; 1849.58,496 1849.58,546
NetC9_2: C9.2 R10.2 R11.1 | length 210.8
  Top Layer w12: C9.2@1919,385 1955,349 2007,349 R11.1@2043,385 R10.2@2100,385
NetC10_2: C10.2 IC3.5 R11.2 | length 334.2
  Top Layer w12: C10.2@1895.04,657.96 IC3.5@1895.04,596 1939.5,596 1980,555.5 R11.2@1980,385
NetC11_2: C11.2 D2.3 R8.1 R9.1 R12.1 R13.2 R14.2 | length 453.5
  Top Layer w12: R13.2@2187.5,508.5 C11.2@2247.5,508.5 R9.1@2247.5,573.5 R12.1@2187.5,573.5 ; C11.2@2254,515 2296.29,515 D2.3@2310.29,529 ; R8.1@2316,429 2310.29,434.72 2310.29,619.28 R14.2@2320,629
NetC12_2: C12.2 IC3.3 R12.2 | length 366.1
  Top Layer w10: 2043.5,546 IC3.3@2087.96,546
  Top Layer w12: 2043.5,546 2029.5,560 2029.5,642.5 C12.2@2048,661 2079.69,692.69 2160.81,692.69 2187.5,666 R12.2@2187.5,636.5
NetC37_2: C37.2 IC5.109 L4.2 | length 116.4
  Top Layer w12: v2(3420.5,232) 3426.85,238.35 IC5.109@3426.85,262.51
  Bottom Layer w12: C37.2@3404,212 3420.5,228.5 L4.2@3420.5,288.44
NetC38_2: C38.2 IC5.37 L3.2 | length 213.8
  Top Layer w8: IC5.37@2595.15,950.49 2634.01,950.49 2641.5,943 2652.5,943 v2(2655.5,946)
  Bottom Layer w20: v2(2655.5,946) 2684.5,946 2690,951.5 C38.2@2690,1005 2687.94,1002.94 L3.2@2687.94,947
NetC39_2: C39.2 IC5.107 L2.2 | length 148.5
  Top Layer w10: IC5.107@3336.3,191.65 3336.3,279.8 v2(3336.5,280)
  Bottom Layer w12: C39.2@3311.44,287.44 L2.2@3371.5,287.44
NetC40_2: C40.2 IC5.35 L1.2 | length 215.5
  Top Layer w10: v3(2616.5,980) 2617.5,979 2641.5,979 2651.5,969 2678.5,969 2685.7,976.2 IC5.35@2685.7,1021.35
  Bottom Layer w12: C40.2@2612.5,1019.5 2616.5,1015.5 v3(2616.5,980) L1.2@2616.5,927.56
NetC45_1: C45.1 C47.1 C48.1 C49.1 IC6.9 IC6.16 IC6.18 L7.1 | length 516.6
  Top Layer w8: v1(2510.5,-112) 2510.5,-127 2520.78,-137.28 IC6.9@2528.93,-137.28 ; v1(2512.5,-303) 2513.5,-302 2513.5,-280 2518.43,-275.07 IC6.16@2528.93,-275.07 ; v1(2576.5,-333) 2578.15,-331.35 IC6.18@2578.15,-304.6
  Bottom Layer w8: C47.1@2550.5,-330.62 C47.1@2552.88,-333
  Bottom Layer w14: L7.1@2466.06,-85 2507.5,-85 2512.5,-80 ; C48.1@2531,-30 2531,-61.5 2512.5,-80 ; v1(2576.5,-333) 2574.12,-330.62 C47.1@2550.5,-330.62 2540.12,-330.62 v1(2512.5,-303) 2512.5,-80